# Altium PCB AD7190.PcbDoc
Units mil, origin at the board's own origin, x right, y up, seen from the top; angles counter-clockwise.
Board outline 1955 x 2063 mil, 2 copper layers (Top Layer, Bottom Layer); 31 components, 29 nets, 113 pads, 235 vias.
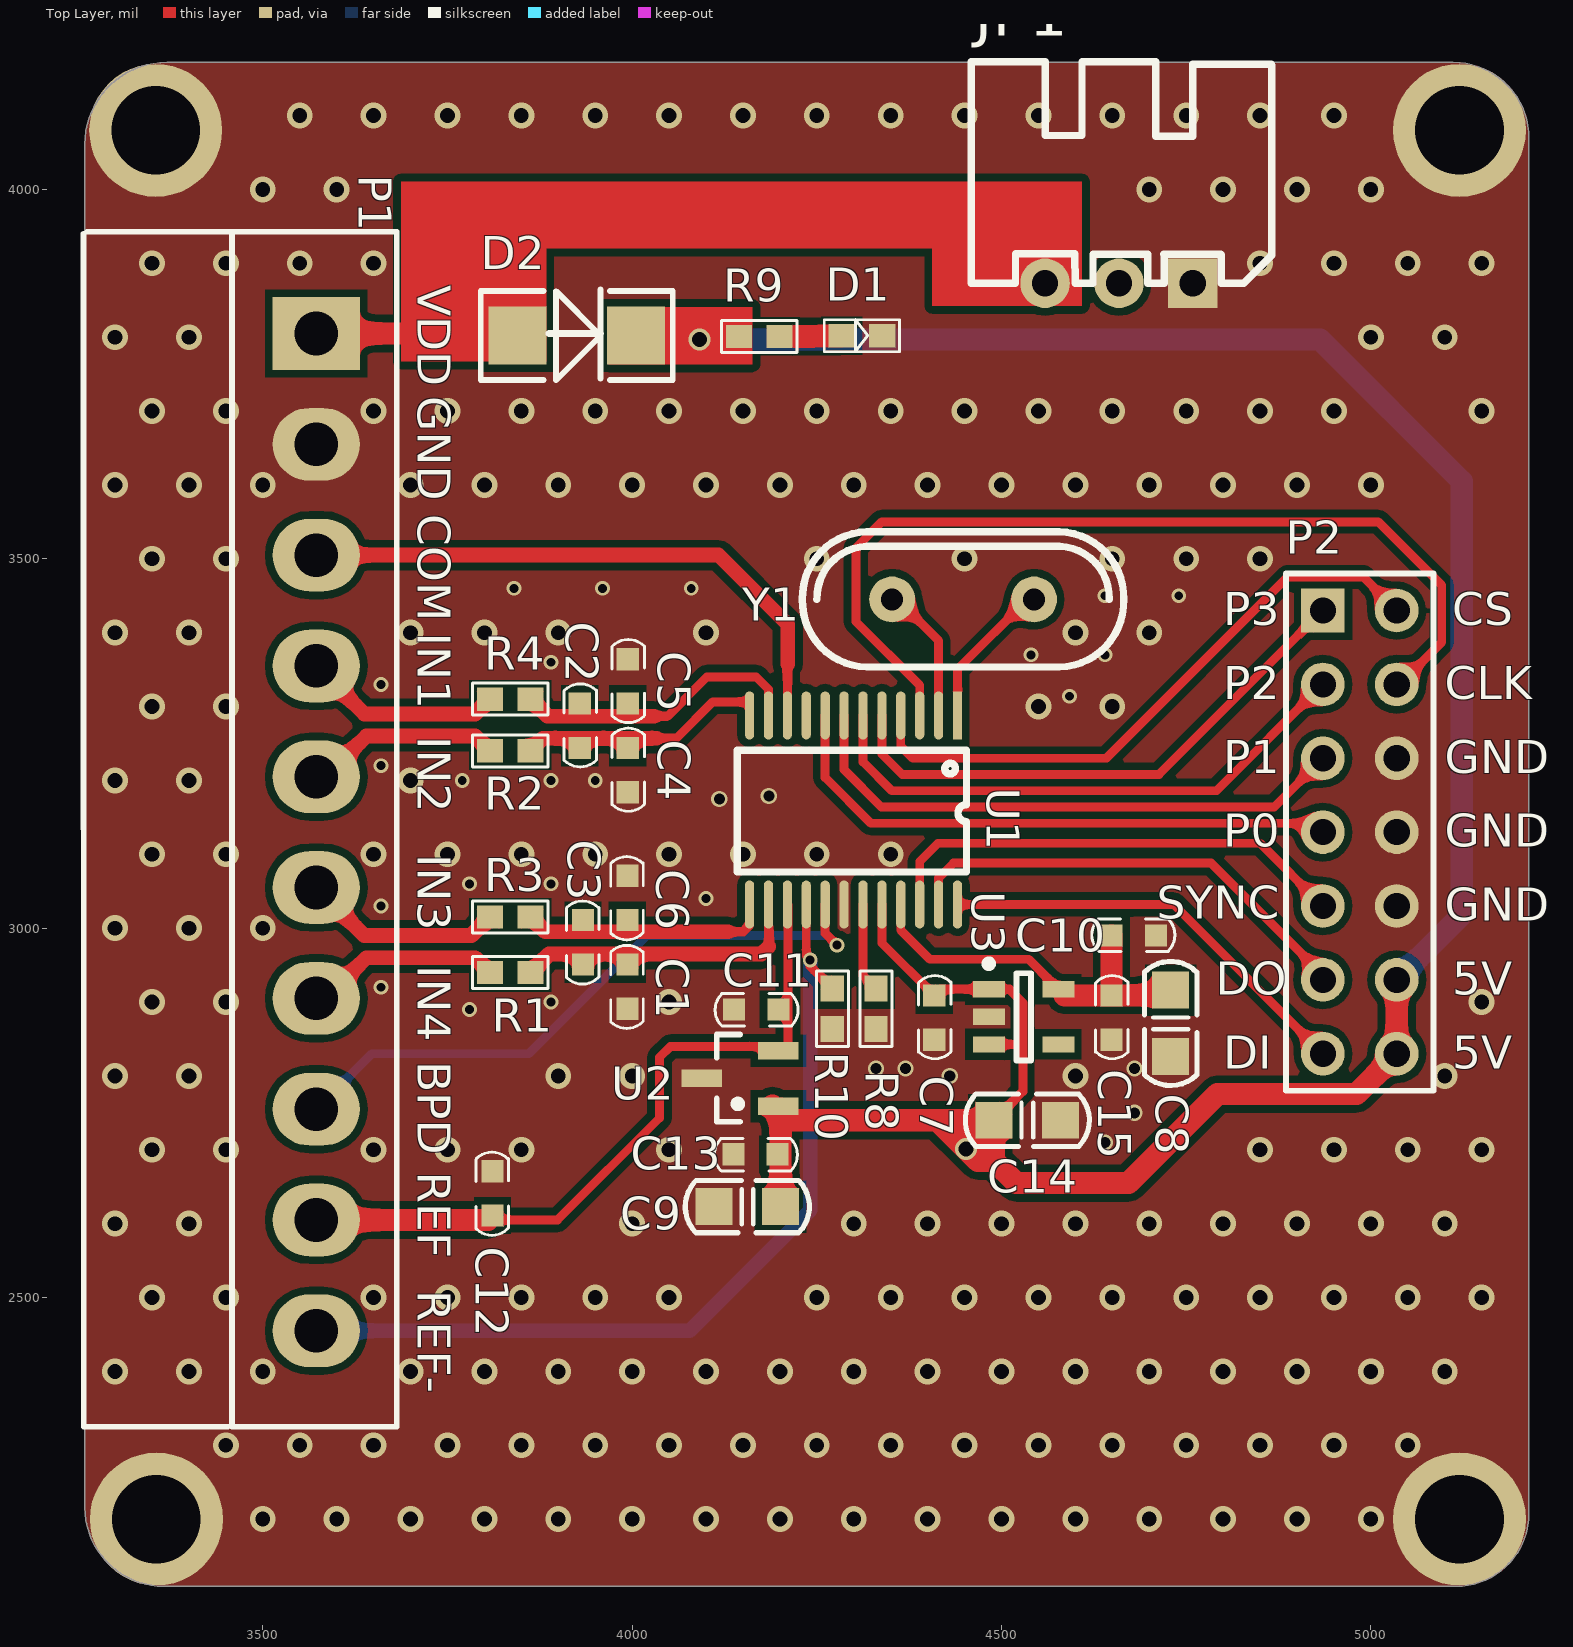
[diagram p0: Top Layer view]
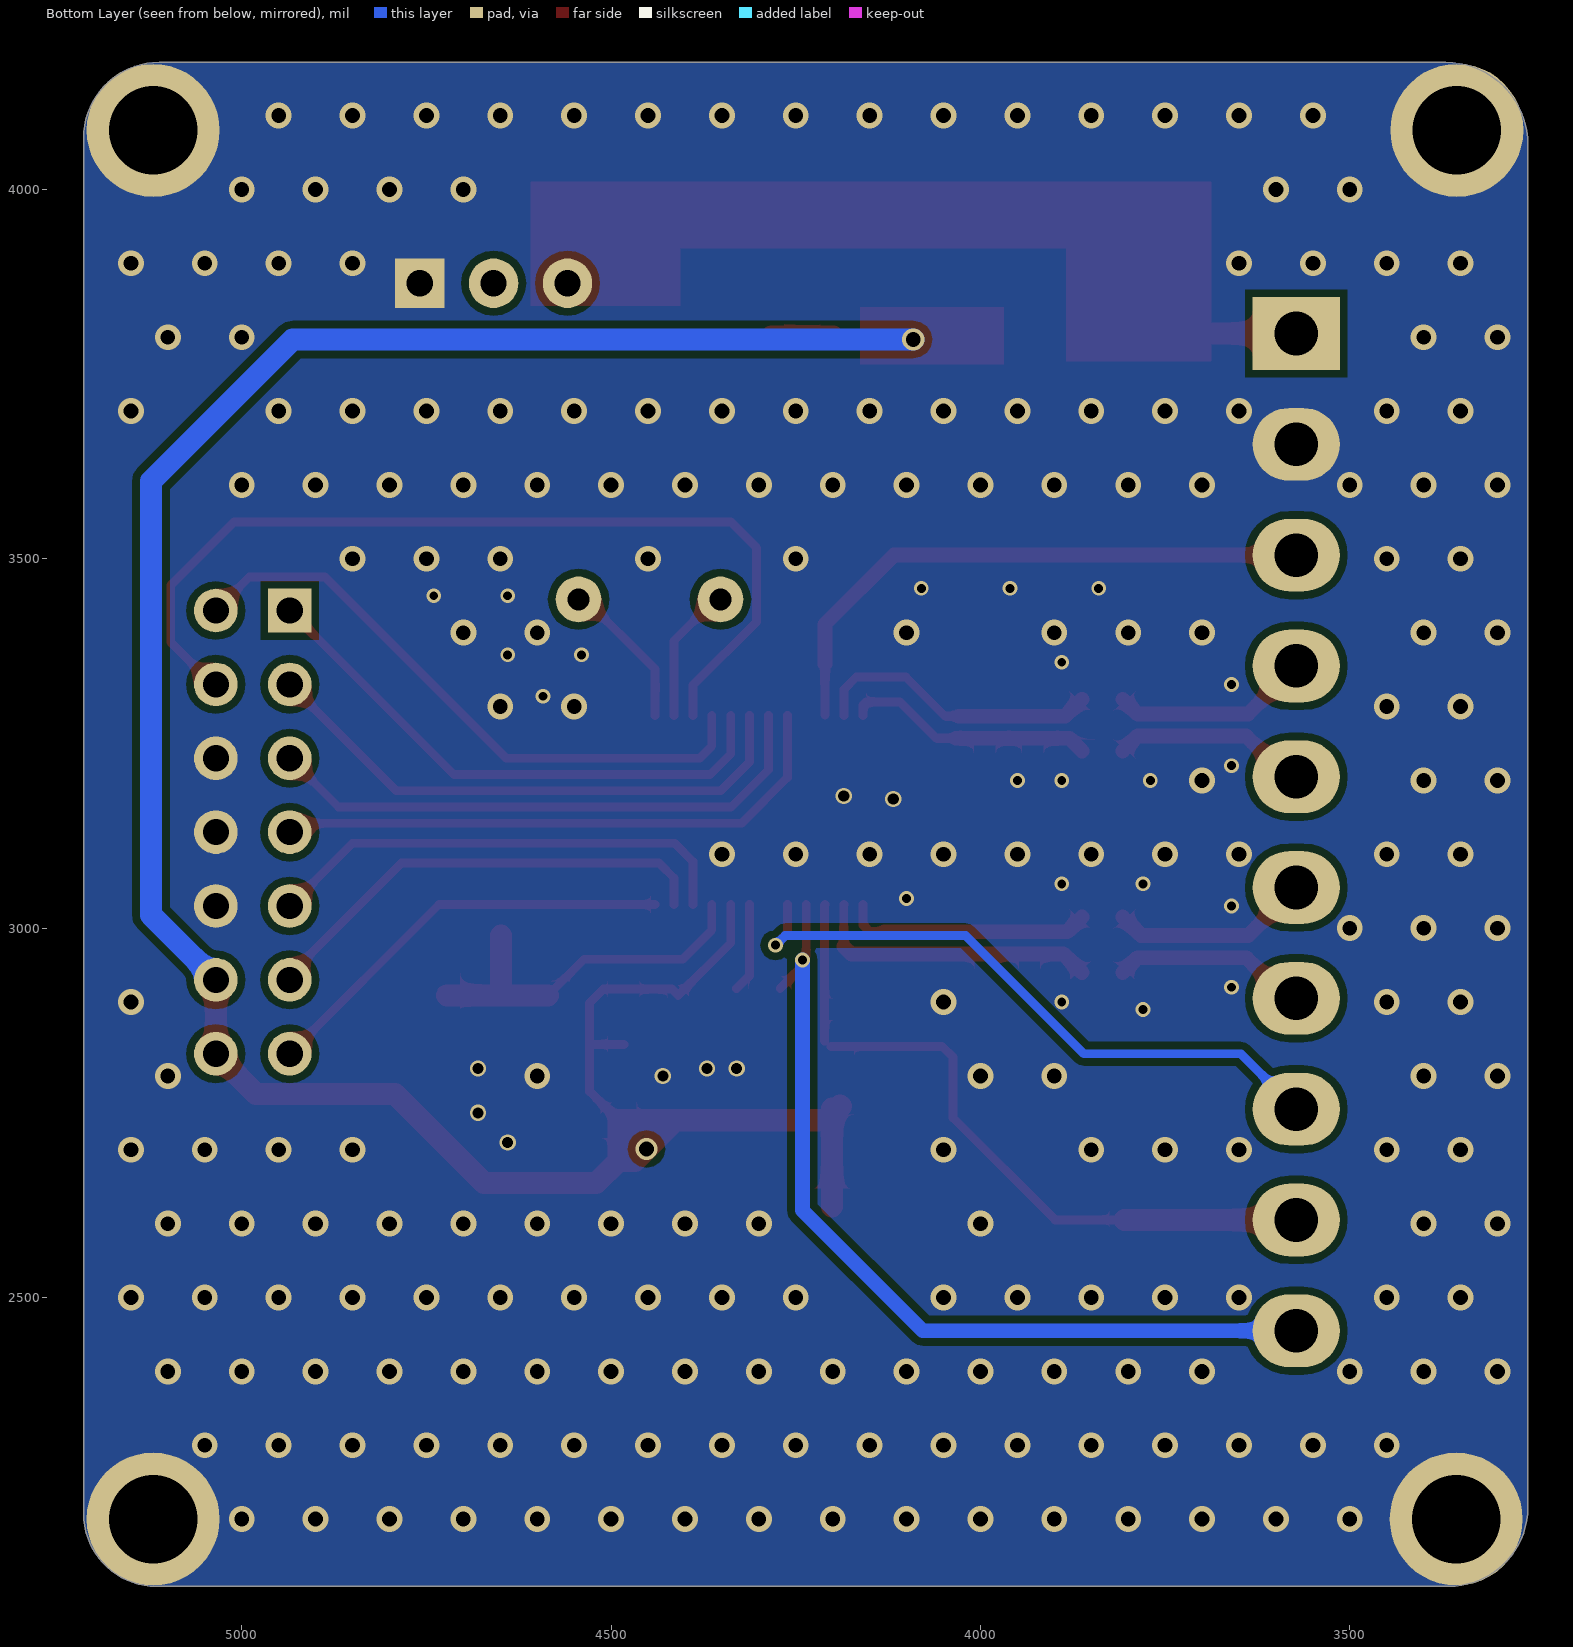
[diagram p1: Bottom Layer view, seen from below]
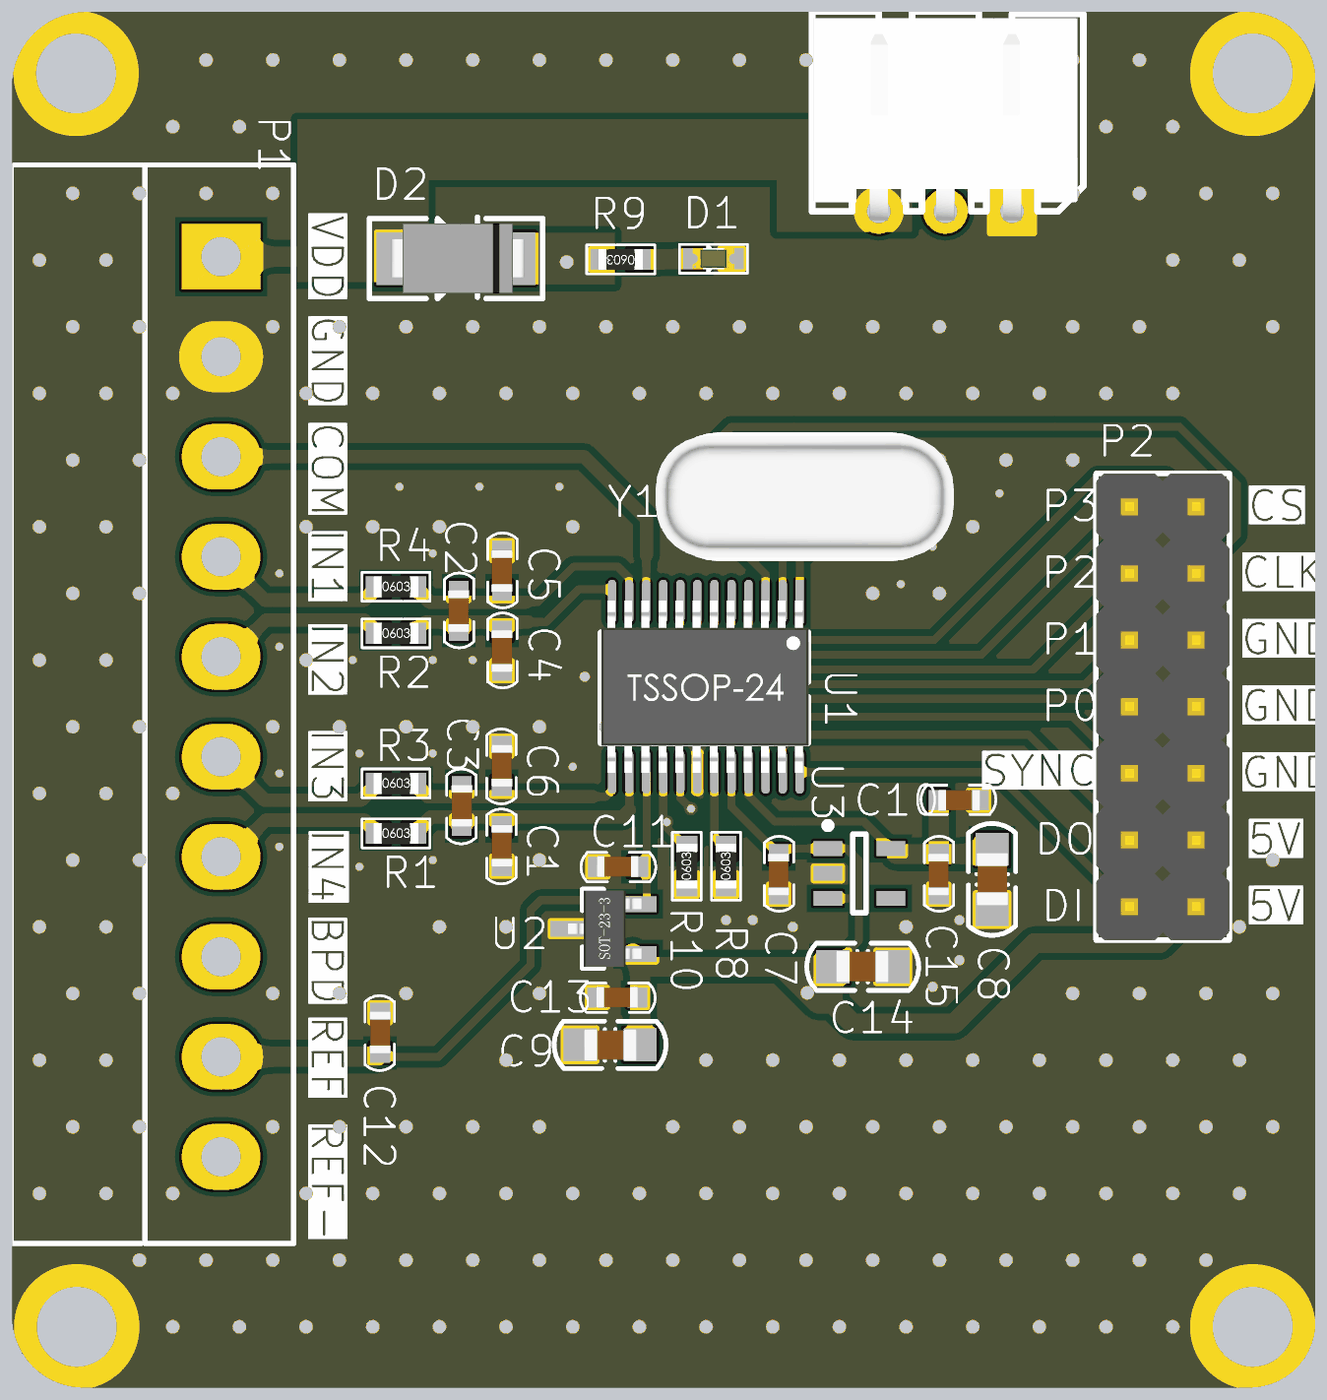
[diagram p2: 3D render of the assembled board from above, using the file's embedded part models]

## Layer stack, top to bottom
Top Solder: solder mask 0.4, Solder Resist, Dk 3.5
Top Layer: signal copper 1.4
Dielectric 1: dielectric 12.6, FR-4, Dk 4.8
Bottom Layer: signal copper 1.4
Bottom Solder: solder mask 0.4, Solder Resist, Dk 3.5

## Board outline
3259,2216.27 ccw(c3366.27,2216.27) 3366.27,2109 5115.38,2109 ccw(c5115.38,2207.62) 5214,2207.62 5214,4069.57 ccw(c5111.57,4069.57) 5111.57,4172 3370,4172 ccw(c3370,4061) 3259,4061

## Design rules (kind name [scope] priority, off if disabled: settings)
Clearance [All] p1: gap=10 ignorepadtopadclearanceinfootprint=FALSE except(0: Arc-Hole Track-Hole SMDPad-Hole THPad-Hole Via-Hole Fill-Hole Poly-Hole Region-Hole Text-Hole)
PolygonConnect [All] p1: connectstyle=Direct reliefconductorwidth=10 reliefentries=4 polygonreliefangle="90 Angle" airgapwidth=10
RoutingVias [All] p1: holewidth=28 width=50 viastyle="Through Hole" minholewidth=28 minwidth=50 maxholewidth=28 maxwidth=50
SolderMaskExpansion [All] p1: expansion=4 istentingtop=FALSE
Width [All] p1: maxlimit=50 minlimit=10 preferedwidth=20 minimp=50.000000 maximp=50.000000 favimp=50.000000
30 further rules are at their usual default settings.

## Components (designator, comment, footprint, x,y, rotation, side; value= is the part's Value field where it differs from the comment)
C1 "0.01uF" C0603 3992.5,2920 r90 top
C2 "1uF" C0603 3930,3275 r270 top
C3 "1uF" C0603 3932.5,2980 r90 top
C4 "0.01uF" C0603 3995,3215 r270 top
C5 "0.01uF" C0603 3995,3335 r270 top
C6 "0.01uF" C0603 3992.5,3040 r90 top
C7 "0.1uF" C0603 4410,2880 r270 top
C8 "4.7uF" C0805 4729,2826 r90 top
C9 "4.7uF" C0805 4111,2623 r0 top
C10 "0.1uF" C0603 4678,2991 r0 top
C11 "0.1uF" C0603 4169,2889 r180 top
C12 "0.01uF" C0603 3810,2640 r90 top
C13 "0.1uF" C0603 4168,2693 r180 top
C14 "4.7uF" C0805 4580,2740 r180 top
C15 "0.1uF" C0603 4650,2880 r270 top
D1 "LED3" LED_GREEN_0603 4311,3802 r0 top
D2 "SS34" DO-214AC 3845,3802 r0 top
JP1 "HDR-1X3" XH2.54-WI-3P 4659,3873 r180 top
P1 "INPUT" KF2EDGK-3.81-10P 3422.5,3355 r270 top
P2 "DATA" HDR2X7 4990,3150 r270 top
R1 "100R" R0603 3835,2940 r0 top
R2 "100R" R0603 3835,3240 r0 top
R3 "100R" R0603 3835,3015 r0 top
R4 "100R" R0603 3835,3310 r0 top
R8 "0Ω" R0603 4330,2891 r90 top
R9 "1kΩ" R0603 4172,3801 r180 top
R10 "0Ω" R0603 4271,2891 r90 top
U1 "AD7190" TSSOP24 4312.5,3160 r270 top
U2 "REF29XX" SOT23-3 4148,2797 r90 top
U3 "RT9013_3.3" SOT23-5 4530,2880 r0 top
Y1 "4.92MHz/NC" XTAL-HC49S 4459,3436 r0 top

## Footprints (in the part's own frame and the unit in brackets; to place one, negate y for a bottom-side part, rotate by r counter-clockwise, add the part's x,y. Pads: shape width x height; smd on the part's side, far side on the other; paste and mask are expansions set on the pad)
C0603 [mil]
  rect 30x30 smd: 1(-29,-1) 2(31,-1)
  silkscreen extent -56,-23 57,22, body extent -30,-17 33,14, height 24
C0805 [mil]
  rect 50x50 smd: 1(0,0) 2(90,0)
  silkscreen extent -39,-36 129,36, body extent 6,-24 85,23, height 47
DO-214AC [mm]
  rect 2x2 smd: 1(0,0.006) 2(4.064,0.006)
  silkscreen extent -1.27,-1.52 5.33,1.58, body extent -0.46,-1.32 4.65,1.35, height 2.12
HDR2X7 [mm]
  rect 1.5x1.5 hole 0.9: 1(-7.112,-1.397)
  round 1.5 hole 0.9: 2(-7.112,1.143) 3(-4.572,-1.397) 4(-4.572,1.143) 5(-2.032,-1.397) 6(-2.032,1.143) 7(0.508,-1.397) 8(0.508,1.143) 9(3.048,-1.397) 10(3.048,1.143) 11(5.588,-1.397) 12(5.588,1.143) 13(8.128,-1.397) 14(8.128,1.143)
  silkscreen extent -8.38,-2.67 9.4,2.41, body extent -8.38,-2.67 9.4,2.41, height 10.1
KF2EDGK-3.81-10P [mm]
  rect 2.5x3 hole 1.5: 1(-11.43,3.81)
  oval 2.5x3 hole 1.5: 2(-7.62,3.81) 3(-3.81,3.81) 4(0,3.81) 5(3.81,3.81) 6(7.62,3.81) 7(11.43,3.81) 8(15.24,3.81) 9(19.05,3.81) 10(22.86,3.81)
  silkscreen extent -14.93,-4.19 26.16,6.58, body extent -14.78,-4.13 26.16,6.48, height 7.61
LED_GREEN_0603 [mm]
  rect 0.9x0.8 smd: 1(-0.699,0) 2(0.699,0)
  silkscreen extent -1.3,-0.55 1.3,0.55, body extent -0.8,-0.4 0.8,0.4, height 0.6
R0603 [mm]
  rect 0.9x0.8 smd: 1(-0.699,0) 2(0.699,0)
  silkscreen extent -1.3,-0.55 1.3,0.55, body extent -0.85,-0.4 0.85,0.4, height 0.56
SOT23-3 [mil] "三极管,SOT23-3 , 3Leads"
  rect 23.62x55 smd: 1(-38,-50) 2(37,-50) 3(0,54)
  silkscreen extent -59,0 59,33, body extent -57,-55 57,55, height 47
SOT23-5 [mm] "SOT23 5 Leads"
  rect 1.1x0.559 smd: 1(-1.2,0.95) 2(-1.2,0) 3(-1.2,-0.95) 4(1.2,-0.95) 5(1.2,0.95)
  silkscreen extent -1.32,-1.5 0.25,1.95, body extent -0.85,-1.5 0.85,1.5, height 1.25
TSSOP24 [mil]
  rect 65x12.5 smd: 1(-127.95,127.95)
  oval 65x12.5 smd: 2(-127.95,102.36) 3(-127.95,76.77) 4(-127.95,51.18) 5(-127.95,25.59) 6(-127.95,0) 7(-127.95,-25.59) 8(-127.95,-51.18) 9(-127.95,-76.77) 10(-127.95,-102.36) 11(-127.95,-127.95) 12(-127.95,-153.54) 13(127.95,-153.54) 14(127.95,-127.95) 15(127.95,-102.36) 16(127.95,-76.77) 17(127.95,-51.18) 18(127.95,-25.59) 19(127.95,0) 20(127.95,25.59) 21(127.95,51.18) 22(127.95,76.77) 23(127.95,102.36) 24(127.95,127.95)
  silkscreen extent -81,-170 84,140, body extent -129,-170 129,142, height 47
XH2.54-WI-3P [mm] "接插件，3P"
  rect 1.7x1.7 hole 0.9: 1(-2.54,0)
  round 1.7 hole 0.9: 2(0,0) 3(2.54,0)
  silkscreen extent -5.26,-7.62 5.08,0, body extent -5.04,-7.35 5.04,0.35, height 5.73
XTAL-HC49S [mil]
  round 62 hole 30: 1(-107.06,9) 2(85.06,9)
  silkscreen extent -229,-83 207,101, body extent -234,-83 212,101, height 142

## Part data
C1 C2 C3 C4 C5 C6 C7 C8 C9 C10 C11 C12 C13 C14 C15: library part "Cap Semi", "Capacitor (Semiconductor SIM Model)"
D1: "Typical BLUE SiC LED"
D2: library part D, "1N4148"
JP1: library part "Header 3", "3P接插件", BOM名称=3P接插件
P1: library part "Header 10", "Header, 10-Pin"
P2: library part "Header 7X2", "Header, 7-Pin, Dual row"
R1 R2 R3 R4 R8 R9 R10: library part Res2, "Resistor"
U3: library part RT9013, "LDO"
Y1: library part XTAL, "MHz"

## Free pads (board coordinates)
  round 180 hole 120: 0(3355,4080) 1(5120,4080) 2(5120,2200) 3(3356,2200)

## Via types
v1: diameter 35, hole 20, Top Layer to Bottom Layer, tented both sides, 202 vias
v2: diameter 20, hole 12, Top Layer to Bottom Layer, tented both sides, 23 vias
v3: diameter 22, hole 15, Top Layer to Bottom Layer, tented both sides, 8 vias
v4: diameter 30, hole 20, Top Layer to Bottom Layer, tented both sides, 2 vias

## Nets (pads, with @x,y where several pads share a name; then routed paths per layer and width w, separated by ;. In a path a pad name is that pad's centre, name@x,y a point inside that pad or via, vN(x,y) a via of type N, cw(c..) or ccw(c..) an arc to the next point about the centre after c; other vN are vias at no path point)
AGND: C1.1 C4.2 C5.1 C6.2 C7.2 C8.1 C9.1 C10.2 C11.2 C12.2 C13.2 C14.1 C15.2 D1.2 JP1.1 P1.2 P2.6 P2.8 P2.10 pad.0 pad.1 pad.2 pad.3 R8.1 R10.1 U1.18 U2.3 U3.2
  other v1: 3500,2200 3600,2200 3700,2200 3800,2200 3900,2200 4000,2200 4100,2200 4200,2200 4300,2200 4400,2200 4500,2200 4600,2200 4700,2200 4800,2200 4900,2200 5000,2200 3450,2300 3550,2300 3650,2300 3750,2300 3850,2300 3950,2300 4050,2300 4150,2300 4250,2300 4350,2300 4450,2300 4550,2300 4650,2300 4750,2300 4850,2300 4950,2300 5050,2300 3300,2400 3400,2400 3500,2400 3700,2400 3800,2400 3900,2400 4000,2400 4100,2400 4200,2400 4300,2400 4400,2400 4500,2400 4600,2400 4700,2400 4800,2400 4900,2400 5000,2400 5100,2400 3350,2500 3450,2500 3650,2500 3750,2500 3850,2500 3950,2500 4050,2500 4250,2500 4350,2500 4450,2500 4550,2500 4650,2500 4750,2500 4850,2500 4950,2500 5050,2500 5150,2500 3300,2600 3400,2600 4000,2600 4300,2600 4400,2600 4500,2600 4600,2600 4700,2600 4800,2600 4900,2600 5000,2600 5100,2600 3350,2700 3450,2700 3650,2700 3750,2700 3850,2700 4050,2700 4850,2700 4950,2700 5050,2700 5150,2700 3300,2800 3400,2800 3900,2800 4000,2800 4600,2800 5100,2800 3350,2900 3450,2900 4050,2900 5150,2900 3300,3000 3400,3000 3500,3000 3350,3100 3450,3100 3650,3100 3750,3100 3850,3100 3950,3100 4050,3100 4150,3100 4250,3100 4350,3100 3300,3200 3400,3200 3700,3200 3350,3300 3450,3300 4550,3300 4650,3300 3300,3400 3400,3400 3700,3400 3800,3400 3900,3400 4100,3400 4600,3400 4700,3400 3350,3500 3450,3500 4250,3500 4450,3500 4650,3500 4750,3500 4850,3500 3300,3600 3400,3600 3500,3600 3700,3600 3800,3600 3900,3600 4000,3600 4100,3600 4200,3600 4300,3600 4400,3600 4500,3600 4600,3600 4700,3600 4800,3600 4900,3600 5000,3600 3350,3700 3450,3700 3650,3700 3750,3700 3850,3700 3950,3700 4050,3700 4150,3700 4250,3700 4350,3700 4450,3700 4550,3700 4650,3700 4750,3700 4850,3700 4950,3700 5150,3700 3300,3800 3400,3800 5000,3800 5100,3800 3350,3900 3450,3900 3550,3900 3650,3900 4850,3900 4950,3900 5050,3900 5150,3900 3500,4000 3600,4000 4700,4000 4800,4000 4900,4000 5000,4000 3550,4100 3650,4100 3750,4100 3850,4100 3950,4100 4050,4100 4150,4100 4250,4100 4350,4100 4450,4100 4550,4100 4650,4100 4750,4100 4850,4100 4950,4100
  other v2: 3780,2890 3890,2900 3660,2920 3660,3030 4100,3040 3780,3060 3890,3060 3770,3200 3890,3200 3950,3200 3660,3220 4592,3314 3660,3330 3890,3360 4540,3370 4640,3370 4640,3450 4740,3450 3840,3460 3960,3460 4080,3460
  other v3: 4640,2710 4680,2750 4430,2800 4330,2810 4370,2810 4680,2810 4118,3175 4185,3179
AIN1: P1.4 R4.1 | length 270.2
  Top Layer w20: P1.4 3637.5,3290 3787.5,3290 R4.1
AIN2: P1.5 R2.1 | length 266.1
  Top Layer w20: P1.5 3585,3205 3640,3260 3787.5,3260 R2.1
AIN3: P1.6 R3.1 | length 272.3
  Top Layer w20: P1.6 3637.5,2990 3782.5,2990 R3.1
AIN4: P1.7 R1.1 | length 266.1
  Top Layer w20: P1.7 3585,2905 3640,2960 3787.5,2960 R1.1
AINCOM: P1.3 U1.10 | length 799.9
  Top Layer w12: U1.10@4210.55,3288.36 4210.55,3357.45
  Top Layer w20: P1.3 4117,3505 4210.55,3411.45 4210.55,3357.45
BPDSW: P1.8 U1.17 | length 869.3
  Top Layer w12: U1.17 4261.32,2993.08 v2(4277.4,2977)
  Bottom Layer w12: P1.8 3647.5,2830 3860,2830 4020,2990 4264.4,2990 v2(4277.4,2977)
CS: P2.2 U1.4 | length 840.3
  Top Layer w12: U1.4 4363.68,3246.32 4380,3230 4642,3230 4887.53,3475.53 4989.47,3475.53 P2.2
DGND: R8.2 U1.19 | length 120.8
  Top Layer w12: U1.19 4312.5,2936 R8.2
DIN: P2.13 U1.24 | length 578.2
  Top Layer w12: U1.24 4732.95,3032.05 P2.13
DOUT: P2.11 U1.23 | length 626.8
  Top Layer w12: U1.23 4414.86,3067.86 4435,3088 4784,3088 P2.11@4935,2937
NetC1_2: C1.2 C3.1 R1.2 U1.14 | length 394.2
  Top Layer w12: U1.14 4185,3031.59 4185,2975
  Top Layer w20: R1.2 3887.5,2965 4175,2965 4185,2975
NetC2_1: C2.1 C5.2 R4.2 U1.11 | length 395.9
  Top Layer w12: 4030,3287 4048,3287 4101,3340 4168,3340 4184.55,3323.45 U1.11
  Top Layer w20: R4.2 3885.5,3287 4030,3287
NetC2_2: C2.2 C4.1 R2.2 U1.12 | length 339.7
  Top Layer w12: 4033,3257 4060,3257 4109.24,3306.24 4154.76,3306.24 4158.96,3302.04 U1.12
  Top Layer w20: R2.2 3879.5,3257 4033,3257
NetC3_2: C3.2 C6.1 R3.2 U1.13 | length 336.5
  Top Layer w12: 4130,2995 4150,2995 4158.96,3003.96 U1.13
  Top Layer w20: R3.2 3882.5,2995 4130,2995
NetD1_1: D1.1 R9.1 | length 83
  Top Layer w30: R9.1 D1.1@4282.5,3801
NetD2_1: D2.1 JP1.3 P1.1 | length 269.8
  Top Layer w30: P1.1 D2.1@3842.25,3805
NetU1_1: U1.1 Y1.2 | length 200.5
  Top Layer w12: U1.1 4440.45,3350.45 Y1.2@4538,3448
NetU1_2: U1.2 Y1.1 | length 202.1
  Top Layer w12: Y1.1@4343.5,3460.5 4414.86,3389.14 U1.2
P0: P2.7 U1.8 | length 788.3
  Top Layer w12: U1.8 4261.32,3203.92 4323.24,3142 4923,3142 P2.7
P1: P2.5 U1.7 | length 769.8
  Top Layer w12: U1.7 4286.91,3214.52 4337.43,3164 4869,3164 P2.5
P2: P2.3 U1.6 | length 761.2
  Top Layer w12: U1.6 4312.5,3225.12 4351.62,3186 4791,3186 P2.3
P3: P2.1 U1.5 | length 752.6
  Top Layer w12: U1.5 4338.09,3235.72 4365.81,3208 4713,3208 P2.1
SCLK: P2.4 U1.3 | length 1263.5
  Top Layer w12: U1.3 4389.27,3328.73 4303,3415 4303,3515 4338,3550 5010,3550 5096,3464 5096,3387 P2.4@5039,3330
SYNC: P2.9 U1.22 | length 649.4
  Top Layer w12: U1.22 4389.27,3090.27 4414,3115 4850,3115 P2.9
VDD3V3: C8.2 C10.1 C15.1 U1.21 U3.5 | length 520.5
  Top Layer w12: U1.21 4363.68,2997.32 4403,2958 4536.65,2958 U3.5 U3.5@4585.65,2909 ; C8.2@4722,2909 C8.2
  Top Layer w30: U3.5@4585.65,2909 C15.1 ; C10.1 C15.1 ; C8.2@4722,2909 C15.1
VDD5V0: C7.1 C9.2 C13.1 C14.2 D2.2 P2.12 P2.14 R9.2 U1.20 U2.1 U3.1 U3.3 | length 3927.2
  Top Layer w12: U1.20 4338.09,2979.91 C7.1 4417.4,2917.4 U3.1 4510.6,2917.4 4529,2899 4529,2840 ; U3.3 4526.4,2842.6 4529,2840 ; C14.2 4529,2779 4529,2840
  Top Layer w30: D2.2 R9.2@4143.25,3802.25 ; U2.1@4189,2759 4190,2760 U2.1@4201,2749 ; C9.2 U2.1@4201,2749 ; U2.1@4201,2756 U2.1@4201,2749 ; 4414,2739 v4(4452,2701) ; P2.12 P2.14 4980.47,2775.47 4792.47,2775.47 4672,2655 4520,2655 4490,2685 ; U2.1@4201,2749 4210,2740 4456,2740 ; v4(4452,2701) 4468,2685 4490,2685 ; v4(4452,2701) 4470,2701 4482.5,2713.5 ; 4456,2740 4482.5,2713.5 ; 4456,2740 C14.2@4471,2740 ; C14.2@4471,2740 C14.2@4481,2730 ; C14.2@4471,2740 C14.2 C14.2@4490,2739 ; C14.2@4481,2730 C14.2@4490,2721 ; C14.2@4481,2730 C14.2@4490,2739 ; 4482.5,2713.5 C14.2@4490,2721 ; 4482.5,2713.5 4490,2706 ; 4490,2685 4490,2706 ; 4490,2706 C14.2@4490,2721 ; C14.2@4490,2721 C14.2@4490,2739
  Bottom Layer w30: v4(4091,3797) 4931,3797 5123,3605 5123,3018 P2.12
VREF+: C11.1 C12.1 P1.9 U1.15 U2.2 | length 948.8
  Top Layer w12: C12.1@3817,2605 3899,2605 4037,2743 4037,2825 4052,2840 U2.2@4202.5,2840 ; U1.15 4211,3031.18 4211,2847
  Top Layer w30: P1.9 C12.1@3805,2605
VREF-: P1.10 R10.2 U1.16 | length 1203.2
  Top Layer w12: U1.16 4235.73,2962.27 v2(4241,2957) 4241,2948.5 R10.2
  Bottom Layer w20: P1.10 4078,2455 4241,2618 v2(4241,2957)
pads on no net: JP1.2 U1.9 U3.4

## Polygon pours and split planes (outlines as drawn)
AGND on Top Layer "AGND_L01_P000" (solid, pour order 0): 3259,2216.27 ccw(c3366.27,2216.27) 3366.27,2109 5115.38,2109 ccw(c5115.38,2207.62) 5214,2207.62 5214,4069.57 ccw(c5111.57,4069.57) 5111.57,4172 3370,4172 ccw(c3370,4061) 3259,4061
AGND on Bottom Layer "AGND_L02_P001" (solid, pour order 1): 3259,2216.27 ccw(c3366.27,2216.27) 3366.27,2109 5115.38,2109 ccw(c5115.38,2207.62) 5214,2207.62 5214,4069.57 ccw(c5111.57,4069.57) 5111.57,4172 3370,4172 ccw(c3370,4061) 3259,4061

## Other copper
Top Layer:
  rectangle net NetD2_1: 4406,3842 4609,4011
  rectangle net NetD2_1: 3843,3920 4609,4011
  rectangle net NetD2_1: 3687,3767 3884,4011
  rectangle net VDD5V0: 3968,3763 4163,3841

## Silkscreen, mask and mechanical layers (free items; w line width, h text height)
Top Overlay:
  text "VDD" at 3710,3870 h45 r270
  text "GND" at 3710,3720 h45 r270
  text "COM" at 3710,3560 h45 r270
  text "P3" at 4800,3410 h45
  text "CS" at 5110,3410 h45
  text "IN1" at 3710,3400 h45 r270
  text "P2" at 4800,3310 h45
  text "CLK" at 5100,3310 h45
  text "IN2" at 3710,3260 h45 r270
  text "P1" at 4800,3210 h45
  text "GND" at 5100,3210 h45
  text "P0" at 4800,3110 h45
  text "GND" at 5100,3110 h45
  text "IN3" at 3710,3100 h45 r270
  text "SYNC" at 4710.02,3012.5 h45
  text "GND" at 5100,3010 h45
  text "IN4" at 3710,2950 h45 r270
  text "DO" at 4790,2910 h45
  text "5V" at 5110,2910 h45
  text "BPD" at 3710,2820 h45 r270
  text "DI" at 4800,2810 h45
  text "5V" at 5110,2810 h45
  text "REF" at 3710,2670 h45 r270
  text "REF-" at 3710,2510 h45 r270
Mechanical 1:
  the board outline again, w10